# Altium PCB Hands_free_Motordrive_V1.PcbDoc
Units mil, origin at the board's own origin, x right, y up, seen from the top; angles counter-clockwise.
Board outline 1400 x 1900 mil, 2 copper layers (Top Layer, Bottom Layer); 32 components, 23 nets, 109 pads, 94 vias.
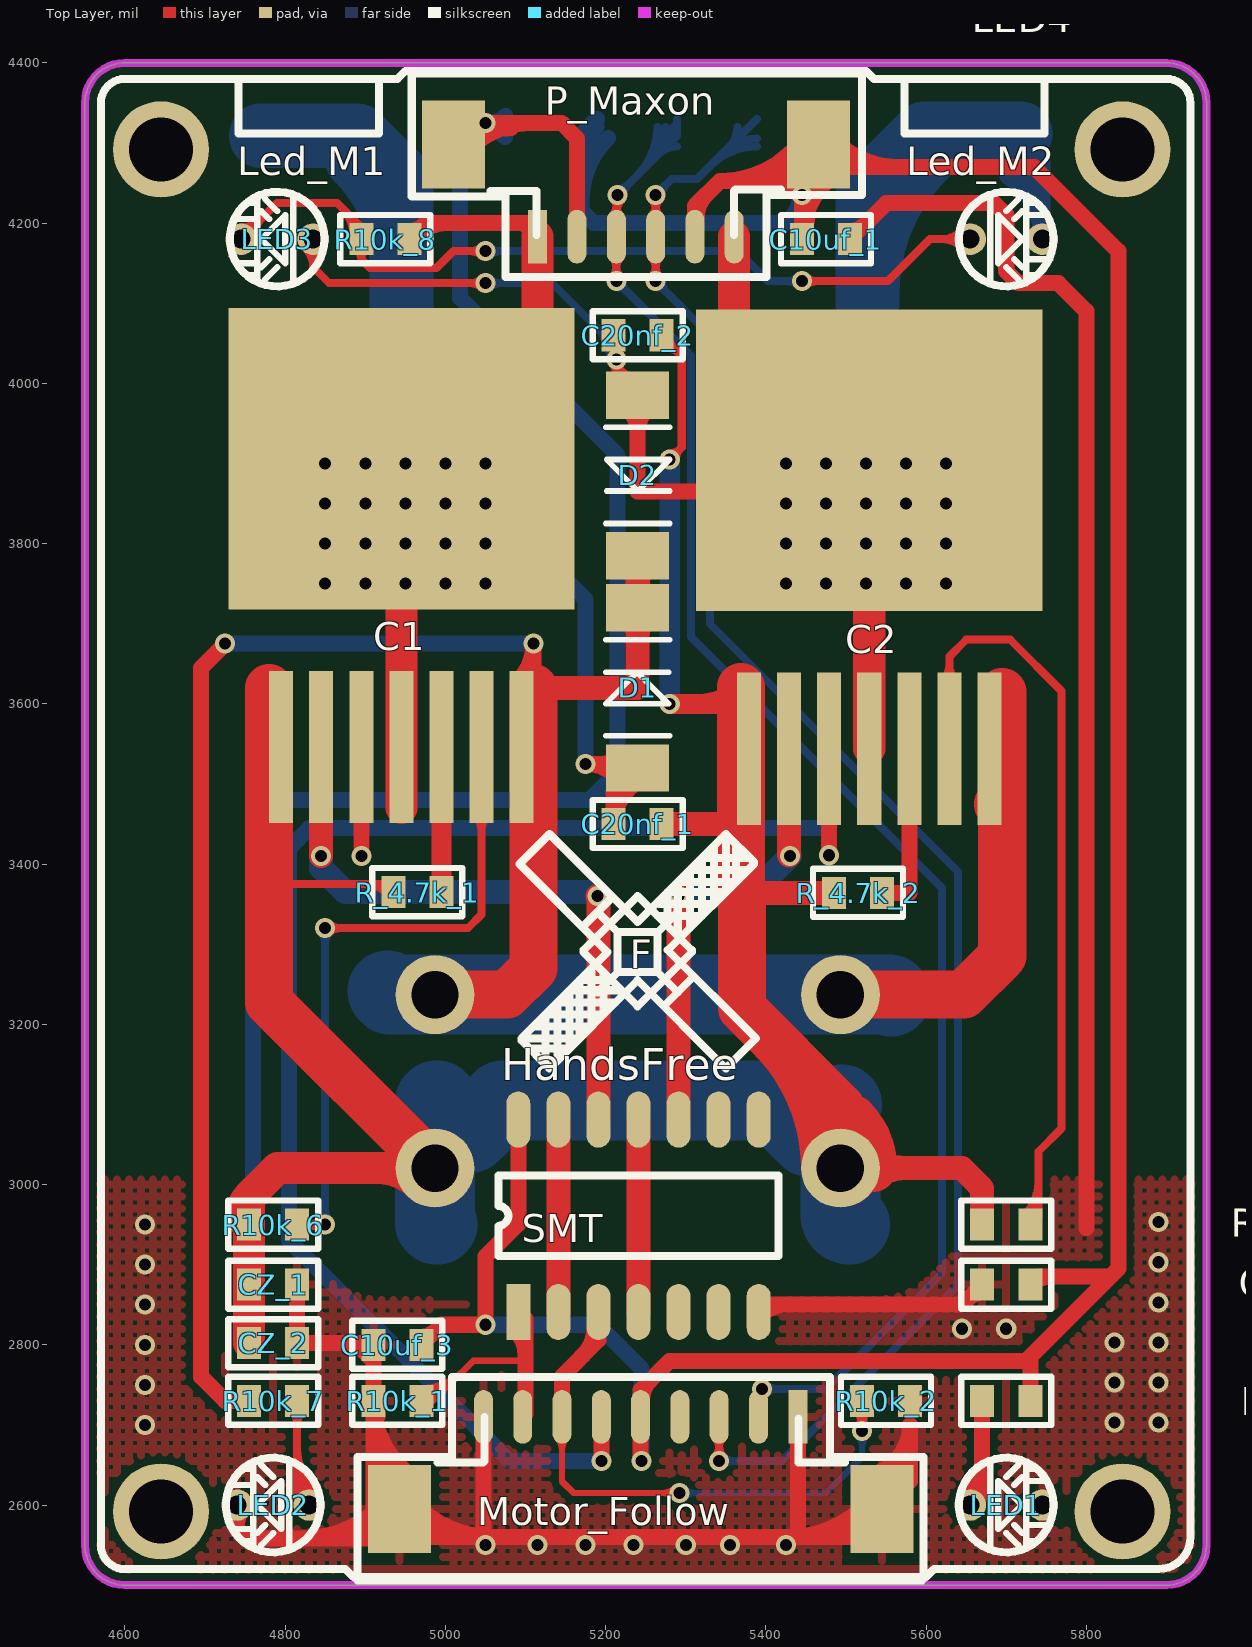
[diagram p0: Top Layer view]
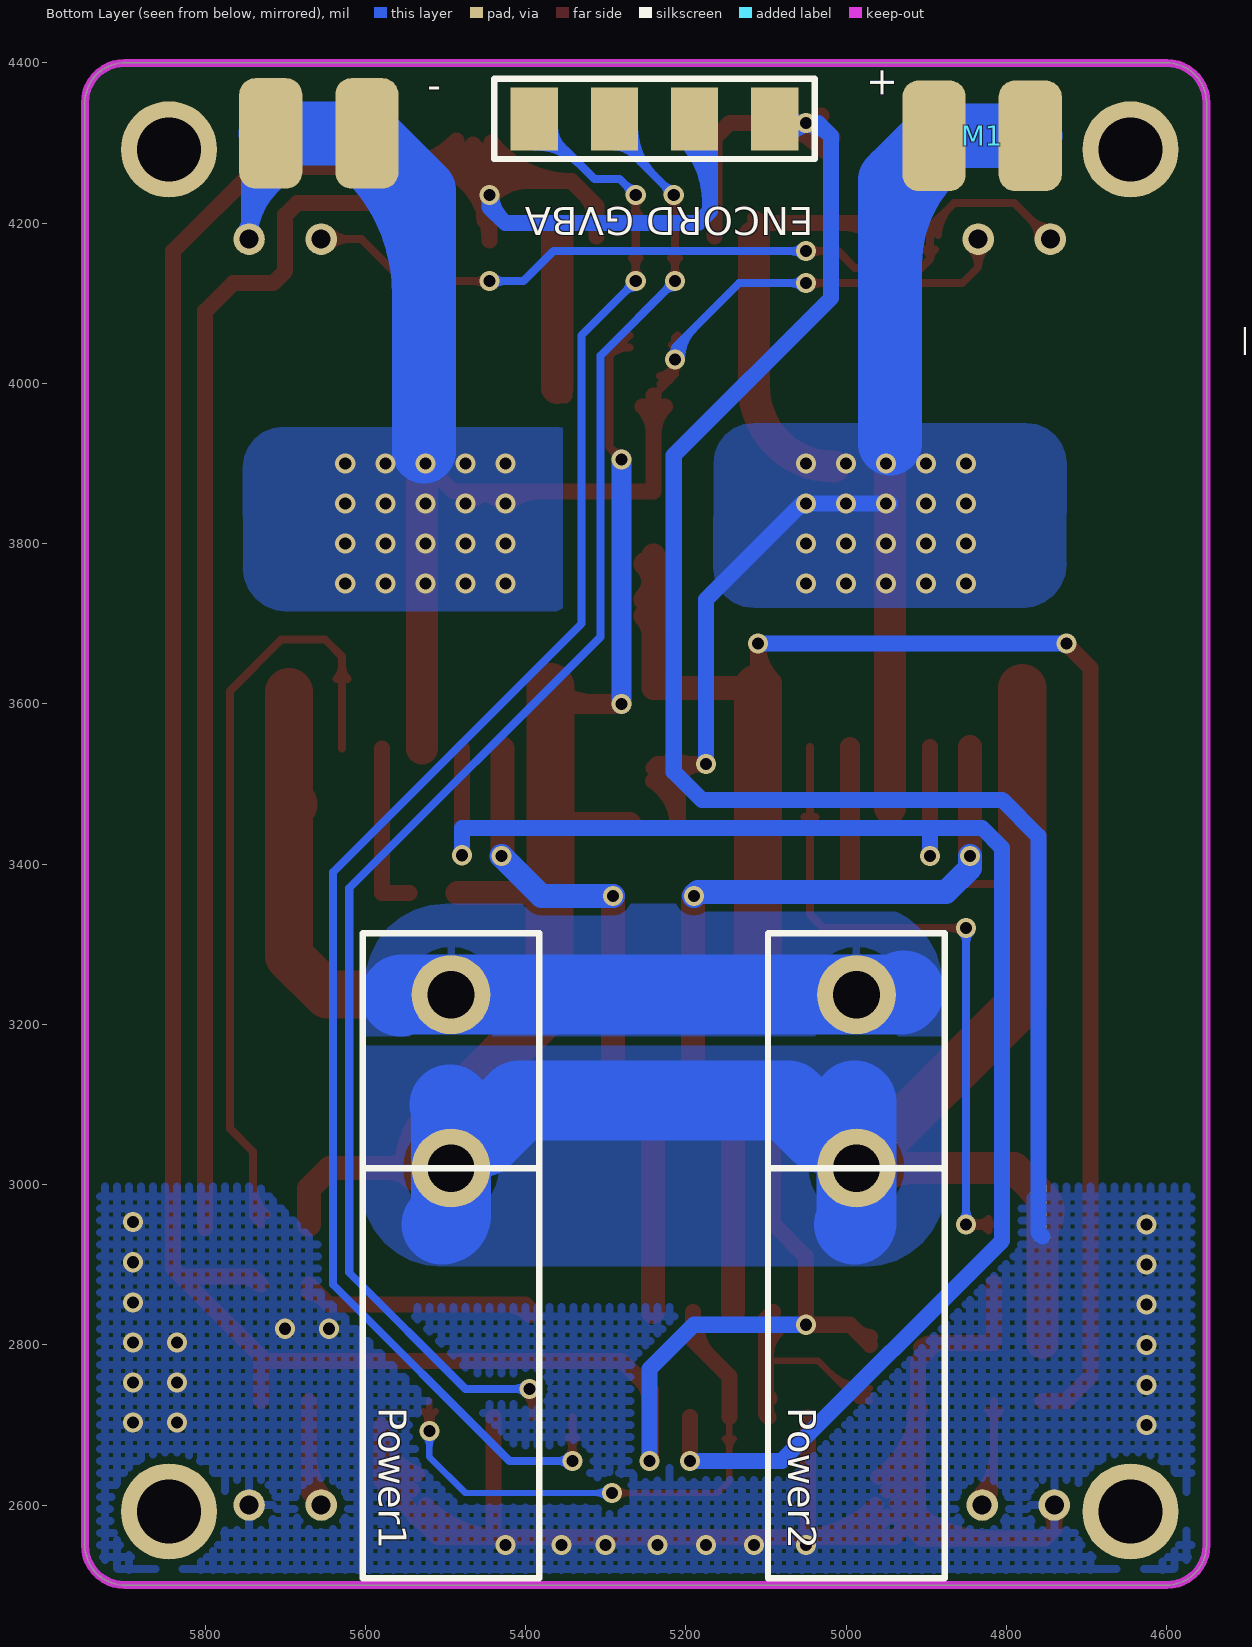
[diagram p1: Bottom Layer view, seen from below]

## Layer stack, top to bottom
Top Layer: signal copper 1.4
Dielectric: dielectric 12.6, FR-4, Dk 4.8
Bottom Layer: signal copper 1.4

## Board outline
4550,2550 4550,4350 cw(c4600,4350) 4600,4400 5900,4400 cw(c5900,4350) 5950,4350 5950,2550 cw(c5900,2550) 5900,2500 4600,2500 cw(c4600,2550)

## Design rules (kind name [scope] priority, off if disabled: settings)
Clearance [All] p1: gap=9
ComponentClearance [All] p1 off: gap=10 collisioncheckmode=3 verticalgap=10 showdistances=FALSE
Height [All] p1 off: minheight=0 maxheight=1000 prefheight=500
HoleToHoleClearance [All] p1: gap=6 allowstackedmicrovias=TRUE
MinimumSolderMaskSliver [All] p1: minsoldermaskwidth=0
PolygonConnect [All] p1: connectstyle=Relief reliefconductorwidth=10 reliefentries=4 polygonreliefangle="90 Angle"
RoutingVias [All] p1: holewidth=28 width=50 viastyle="Through Hole" minholewidth=10 minwidth=20 maxholewidth=50 maxwidth=50
SilkToSilkClearance [All] p1: silktosilkclearance=0
SilkscreenOverComponentPads SilkToSolderMaskClearance [IsPad] p1: minsilkscreentomaskgap=0
SolderMaskExpansion [All] p1: expansion=4
Width [All] p1: maxlimit=200 minlimit=7 preferedwidth=7
22 further rules are at their usual default settings.

## Components (designator, comment, footprint, x,y, rotation, side; value= is the part's Value field where it differs from the comment)
C1 "CHP_BTS7970" CHP_BTS7970_P-TO-263_7 4795,3546 r0 top
C2 "CHP_BTS7970" CHP_BTS7970_P-TO-263_7 5379,3544 r0 top
C10uf_1 "ELE_Cap" ELE_0603_P 5475,4180 r0 top
C10uf_2 "ELE_Cap" ELE_0603_P 5700,2874.96 r180 top
C10uf_3 "ELE_Cap" ELE_0603_P 4940,2800 r180 top
C20nf_1 "ELE_Cap" ELE_0603_P 5240,3450 r0 top
C20nf_2 "ELE_Cap" ELE_0603_P 5240,4060 r180 top
CZ_1 "ELE_RES_1" ELE_0603_P 4785,2875 r0 top
CZ_2 "ELE_RES_1" ELE_0603_P 4785,2802 r0 top
D1 "1N4148" ELE_D1206 5340,3520 r90 top
D2 "1N4148" ELE_D1206 5140,3985 r270 top
"ENCORD GVBA" "HDR_Header_1*4" HDR_Header_2.54_PH_1*4 5089,4330 r0 bottom
LED1 "ELE_LED_DV" ELE_LED_DV 5650,2600 r0 top
LED2 "ELE_LED_DV" ELE_LED_DV 4835,2600 r180 top
LED3 "ELE_LED_DV" ELE_LED_DV 4840,4180 r180 top
LED4 "ELE_LED_DV" ELE_LED_DV 5650,4180 r0 top
M1 "HDR_Header_1*2" HDR_H_PH_2P 4770,4309 r270 bottom
M2 "HDR_Header_1*2" HDR_H_PH_2P 5598,4312 r270 bottom
Motor_Follow "*MOTOR" HDR_MOLEX_PH_1.25_9P 5440,2710 r180 top
P_Maxon "HANDS_FREE_MAXON_MOLEX6P" HDR_MOLEX_PH_1.25_6P 5115,4183 r0 top
Power1 "HDR_Header_Power_2P" HDR_MOLEX_POWER5557_DH_2P 5493,3237 r270 bottom
Power2 "HDR_Header_Power_2P" HDR_MOLEX_POWER5557_DH_2P 4987,3237 r270 bottom
R1k_1 "ELE_RES_1" ELE_0603_P 5700,2729.96 r180 top
R10k_1 "ELE_RES_1" ELE_0603_P 4940,2730 r0 top
R10k_2 "ELE_RES_1" ELE_0603_P 5550,2729.96 r180 top
R10k_5 "ELE_RES_1" ELE_0603_P 5700,2950 r0 top
R10k_6 "ELE_RES_1" ELE_0603_P 4785,2950 r0 top
R10k_7 "ELE_RES_1" ELE_0603_P 4785,2730 r0 top
R10k_8 "ELE_RES_1" ELE_0603_P 4925,4180 r0 top
R_4.7k_1 "ELE_RES_1" ELE_0603_P 4965,3365 r0 top
R_4.7k_2 "ELE_RES_1" ELE_0603_P 5515,3364 r0 top
SMT "CHP_74HC14" CHP_SOP_14P 5091,2841 r90 top

## Footprints (in the part's own frame and the unit in brackets; to place one, negate y for a bottom-side part, rotate by r counter-clockwise, add the part's x,y. Pads: shape width x height; smd on the part's side, far side on the other; paste and mask are expansions set on the pad)
CHP_BTS7970_P-TO-263_7 [mil]
  rect 30x190 smd: 1(0,0) 2(50,0) 3(100,0) 4(150,0) 5(200,0) 6(250,0) 7(300,0)
  rect 432x376 smd: 8(150,360)
CHP_SOP_14P [mil]
  rect 70x30 smd: 1(0,0)
  oval 70x30 smd: 2(0,-50) 3(0,-100) 4(0,-150) 5(0,-200) 6(0,-250) 7(0,-300) 8(240,-300) 9(240,-250) 10(240,-200) 11(240,-150) 12(240,-100) 13(240,-50) 14(240,0)
  silkscreen extent 70,-325 170,25
ELE_0603_P [mil]
  rect 30x40 smd: 1(-30,0) 2(30,0)
  silkscreen extent -56,-30 56,30
ELE_D1206 [mm]
  rect 1.5x2 smd: 1(0,2.54) 2(5.08,2.54)
  silkscreen extent 1.02,1.52 4.06,3.56
ELE_LED_DV [mm] "Connector; Header; 2 Po"
  round 1 hole 0.6: 1(0.127,0) 2(2.413,0)
  silkscreen extent -0.23,-1.5 2.77,1.5
HDR_H_PH_2P [mm]
  rrect50% 3.5x2 smd: 1(0,0) 2(0,-3.048)
HDR_Header_2.54_PH_1*4 [mm] "Connector; Header; 4 Position"
  rect 1.5x2 smd: 1(0,0) 2(2.54,0) 3(5.08,0) 4(7.62,0)
  silkscreen extent -1.27,-1.27 8.89,1.27
HDR_MOLEX_PH_1.25_6P [mm]
  rect 0.6x1.7 smd: 1(0,0)
  oval 0.6x1.7 smd: 2(1.25,0) 3(2.5,0) 4(3.745,0) 5(4.989,0) 6(6.234,0)
  rect 2x2.8 smd: 7(-2.667,2.921) 8(8.901,2.921)
  silkscreen extent -3.99,-1.27 10.29,5.18
HDR_MOLEX_PH_1.25_9P [mm]
  rect 0.6x1.7 smd: 1(0,0)
  oval 0.6x1.7 smd: 2(1.25,0) 3(2.5,0) 4(3.745,0) 5(4.989,0) 6(6.234,0) 7(7.478,0) 8(8.723,0) 9(9.968,0)
  rect 2x2.8 smd: 10(-2.667,2.921) 11(12.635,2.921)
  silkscreen extent -3.99,-1.27 13.97,5.18
HDR_MOLEX_POWER5557_DH_2P [mm]
  round 2.5 hole 1.5: 1(0,0) 2(5.5,0)
  silkscreen extent -1.95,-2.8 18.5,2.8

## Part data
C10uf_1 C10uf_2 C10uf_3 C20nf_1 C20nf_2: "µçÈ"
CZ_1 CZ_2 R1k_1 R10k_1 R10k_2 R10k_5 R10k_6 R10k_7 R10k_8 R_4.7k_1 R_4.7k_2: "µç×"
D1 D2: library part ELE_Diode, "二极"
LED1 LED2 LED3 LED4: "发光二极管 直插"
Motor_Follow: library part HANDS_FREE_MOTOR
SMT: "反相施密特 7输入"

## Free pads (board coordinates)
  round 120 hole 80: 0(4645,2592) 0(4645,4292) 0(5845,2592) 0(5845,4292)

## Via types
v1: diameter 25, hole 15, Top Layer to Bottom Layer, 94 vias

## Nets (pads, with @x,y where several pads share a name; then routed paths per layer and width w, separated by ;. In a path a pad name is that pad's centre, name@x,y a point inside that pad or via, vN(x,y) a via of type N, cw(c..) or ccw(c..) an arc to the next point about the centre after c; other vN are vias at no path point)
A_Y1: SMT.4 SMT.11 | length 240
  Top Layer w30: SMT.4 SMT.11
ADC: Motor_Follow.4
B_Y1: SMT.2 SMT.13 | length 240
  Top Layer w30: SMT.2 SMT.13
ENCORD_A: "ENCORD GVBA.4" Motor_Follow.3 P_Maxon.4 | length 2510.1
  Top Layer w10: v1@5257.12,4132.88 ccw(c5244.32,4145.68) 5262.43,4145.68 ccw(c5280.53,4145.68) v1@5267.73,4132.88 ; v1@5257.12,4229.7 cw(c5244.32,4216.89) 5262.43,4216.89 cw(c5280.53,4216.89) v1@5267.73,4229.7 ; P_Maxon.4@5257.61,4156.53 cw(c5245.98,4144.9) 5262.43,4144.9 cw(c5278.87,4144.9) P_Maxon.4@5267.24,4156.53 ; P_Maxon.4@5257.61,4209.47 ccw(c5245.98,4221.1) 5262.43,4221.1 ccw(c5278.87,4221.1) P_Maxon.4@5267.24,4209.47 ; v1(5262.43,4127.57) P_Maxon.4 v1@5262.43,4232.43 ; v1@5336.27,2660.3 ccw(c5323.47,2673.11) 5341.57,2673.11 ccw(c5359.68,2673.11) v1@5346.88,2660.3 ; Motor_Follow.3@5336.76,2683.53 cw(c5325.13,2671.9) 5341.57,2671.9 cw(c5358.02,2671.9) Motor_Follow.3@5346.39,2683.53 ; v1@5341.57,2656.57 Motor_Follow.3
  Bottom Layer w10: v1@5262.43,4120.07 cw(c5262.43,4101.97) 5275.23,4114.77 cw(c5288.03,4127.57) v1@5269.93,4127.57 ; v1(5262.43,4127.57) 5330,4060 5330,3700 5640,3390 5640,2875 5420,2655 v1(5341.57,2655) ; v1(5262.43,4235) 5282.43,4255 5314,4255 5389,4330 ; v1@5262.43,4242.5 ccw(c5262.43,4260.61) 5275.23,4247.8 ccw(c5288.03,4235) v1@5269.93,4235 ; 5330.33,4271.33 cw(c5389,4212.65) 5389,4295.63 ; v1@5346.88,2649.7 cw(c5359.68,2636.89) 5359.68,2655 cw(c5359.68,2673.11) v1@5346.88,2660.3 ; 5347.4,4288.4 cw(c5389,4246.8) 5389,4305.63 ; 5354.09,4295.09 ccw(c5329.02,4320.16) 5364.47,4320.16
ENCORD_B: "ENCORD GVBA.3" Motor_Follow.2 P_Maxon.3 | length 2352.4
  Top Layer w10: v1@5208.12,4132.88 ccw(c5195.32,4145.68) 5213.43,4145.68 ccw(c5231.53,4145.68) v1@5218.73,4132.88 ; P_Maxon.3@5208.61,4156.53 cw(c5196.98,4144.9) 5213.43,4144.9 cw(c5229.87,4144.9) P_Maxon.3@5218.24,4156.53 ; P_Maxon.3@5208.61,4209.47 ccw(c5196.98,4221.1) 5213.43,4221.1 ccw(c5229.87,4221.1) P_Maxon.3@5218.24,4209.47 ; v1@5209.7,4229.7 cw(c5200.7,4220.7) 5213.43,4220.7 ; v1(5213.43,4127.57) P_Maxon.3 5213.43,4233.43 v1(5215,4235) ; P_Maxon.3@5213.43,4213.09 cw(c5236.91,4213.09) v1@5220.3,4229.7 ; Motor_Follow.2 5390.79,2740.79 v1(5395,2745) ; Motor_Follow.2@5390.79,2716.72 cw(c5423.28,2716.72) v1@5400.3,2739.7
  Bottom Layer w10: v1@5213.43,4120.07 cw(c5213.43,4101.97) 5226.23,4114.77 cw(c5239.03,4127.57) v1@5220.93,4127.57 ; v1(5213.43,4127.57) 5306.5,4034.5 5306.5,3683.5 5620,3370 5620,2890 5475,2745 v1(5395,2745) ; v1(5215,4235) 5289,4309 5289,4330 ; v1@5215,4242.5 ccw(c5215,4260.61) 5227.8,4247.8 ccw(c5240.61,4235) v1@5222.5,4235 ; 5239.24,4259.24 ccw(c5178.32,4320.16) 5264.47,4320.16 ; 5256.31,4276.31 ccw(c5212.46,4320.16) 5274.47,4320.16 ; 5266.18,4286.18 cw(c5289,4263.35) 5289,4295.63 ; 5273.38,4293.38 ccw(c5246.61,4320.16) 5284.47,4320.16 ; v1@5400.3,2739.7 cw(c5413.11,2726.89) 5413.11,2745 cw(c5413.11,2763.11) v1@5400.3,2750.3
GND: C1.1 C2.1 C20nf_1.2 C20nf_2.1 CZ_1.1 CZ_2.1 Power1.2 Power2.2 R10k_5.1 R10k_6.1 R_4.7k_1.1 R_4.7k_2.1 | length 4476.7
  Top Layer w10: 4780,3365 4800,3375 4925,3375 R_4.7k_1.1 ; 4898.79,3375 cw(c4898.79,3333.79) R_4.7k_1.1@4927.93,3362.93 ; C20nf_2.1 5295,4035 ; C20nf_2.1@5270.19,4045 cw(c5270.84,4010.84) 5295,4035 ; v1(5280,3905) 5295,3920 5295,4035 ; v1@5280,3912.5 ccw(c5280,3930.61) 5292.8,3917.8 ccw(c5305.61,3905) v1@5287.5,3905 ; C20nf_2.1@5280,4055 ccw(c5292.07,4055) C20nf_2.1@5283.53,4046.46
  Top Layer w25: v1(5280,3600) 5355,3600 ; 5315.02,3600 ccw(c5315.02,3687.98) C2.1@5377.23,3625.77
  Top Layer w30: C20nf_1.2 C2.1@5368,3450 ; 5345.2,3450 ccw(c5345.2,3497.8) C2.1@5379,3464 ; 5370,3364 R_4.7k_2.1 ; Power1.2 5644.54,3020.46 5670,2995 R10k_5.1 ; Power1.2@5517.19,2996.27 cw(c5575.6,2937.87) 5575.6,3020.46 cw(c5575.6,3103.06) Power1.2@5517.19,3044.66
  Top Layer w40: R10k_6.1@4750,2955 cw(c4810.36,2955) 4767.68,2997.68 ; R10k_6.1@4750.66,2952.52 cw(c4774.08,2965.92) 4755,2985 ; CZ_2.1 R10k_6.1 4755,2985 ; Power2.2@4966.34,2999.81 ccw(c4916.47,2949.94) 4916.47,3020.46 ccw(c4916.47,3090.99) Power2.2@4966.34,3041.12 ; Power2.2 4790.46,3020.46 4755,2985
  Top Layer w60: C1.1@4780,3620 4780,3227.46 Power2.2 ; 5369,3365 C2.1@5369,3621 ; 5370,3364 5370,3220 5493,3097 Power1.2 ; 5406.08,3183.92 cw(c5242.63,3020.46) Power1.2@5473.79,3020.46 ; 5508.51,3081.49 cw(c5447.48,3020.46) Power1.2@5533.79,3020.46
  Bottom Layer w25: v1(5280,3600) v1(5280,3905)
  Bottom Layer w100: 4990,2950 cw(c4990,2953) 4987,2953 Power2.2 4987,3102 cw(c4990,3102) 4990,3105 ; 5030.77,3064.23 5071.54,3105 5408.46,3105 5454.23,3059.23 ; 5495,3100 ccw(c5495,3098) 5493,3098 Power1.2 5493,2962 ccw(c5505,2962) 5505,2950
GND_L: "ENCORD GVBA.1" C10uf_1.2 C10uf_2.2 C10uf_3.2 CZ_1.2 CZ_2.2 LED1.2 LED2.2 Motor_Follow.1 Motor_Follow.9 Motor_Follow.10 Motor_Follow.11 P_Maxon.2 P_Maxon.7 R10k_1.1 R10k_2.1 SMT.7 | length 7230.4
  Top Layer w20: LED2.2@4733.15,2593.15 cw(c4716.62,2576.62) 4740,2576.62 cw(c4763.38,2576.62) LED2.2@4746.85,2593.15 ; LED2.2 4740,2570 4751.5,2558.5 4906.07,2558.5 Motor_Follow.11@4923.29,2575.71 ; CZ_1.2@4815,2877 CZ_1.2 CZ_2.2 4888,2802 4910,2780 R10k_1.1 ; 4821.57,2558.5 ccw(c4821.57,2700.26) Motor_Follow.11@4921.81,2600.02 ; 4869.85,2558.5 ccw(c4869.85,2651.97) Motor_Follow.11@4935.95,2585.88 ; R10k_1.1@4907.5,2720.67 cw(c4899.26,2706.39) R10k_1.1@4915.18,2710.66 ; 4910,2652.99 ccw(c4972.26,2652.99) Motor_Follow.11@4936.46,2602.05 ; 4910,2691.49 ccw(c4999.32,2691.49) Motor_Follow.11@4947.96,2618.41 ; Motor_Follow.11@4949.2,2585.88 ccw(c5011.67,2648.35) 5011.67,2560 ; Motor_Follow.11@4959.46,2634.78 cw(c5026.38,2730) R10k_1.1 ; Motor_Follow.11@4963.34,2600.02 ccw(c5059.96,2696.64) 5059.96,2560 ; P_Maxon.7@5016.63,4307.12 cw(c5059.79,4263.96) v1@5059.79,4325 ; P_Maxon.7@5026.64,4290.03 ccw(c4997.11,4331.32) P_Maxon.7@5047.52,4325.3 ; P_Maxon.7@5030.77,4292.98 cw(c5108.07,4215.68) 5108.07,4325 ; P_Maxon.7@5030.77,4334.52 ccw(c5053.74,4357.49) v1@5053.74,4325 ; P_Maxon.7@5032.08,4333.12 ccw(c5050,4348.84) v1(5050,4325) 5145,4325 5164.21,4305.79 P_Maxon.2 ; v1@5047.57,2560.43 Motor_Follow.9 ; v1@5051.68,4326.85 ccw(c5074.38,4351.8) 5082.01,4318.95 ; SMT.7 5400,2850 5645.04,2850 C10uf_2.2 ; SMT.7@5394.54,2837.46 cw(c5424.8,2807.2) 5424.8,2850 ; v1@5427.62,2560 ccw(c5427.62,2696.64) Motor_Follow.10@5524.23,2600.02 ; 5440,2562 Motor_Follow.1 ; 5475.9,2560 ccw(c5475.9,2648.35) Motor_Follow.10@5538.37,2585.88 ; C10uf_1.2 5550,4225 5685,4225 5700,4210 5700,4140 5715,4125 5765,4125 5800,4090 5800,2946 ; C10uf_1.2@5505,4190 ccw(c5505,4214.14) 5522.07,4197.07 ; Motor_Follow.10@5535.73,2638.62 ccw(c5515.31,2700) 5580,2700 5580,2630 Motor_Follow.10 5510,2560 4939,2560 Motor_Follow.11@4923.29,2575.71 ; Motor_Follow.10@5542.04,2619.64 ccw(c5524.54,2672.27) 5580,2672.27 ; Motor_Follow.10@5548.36,2600.66 ccw(c5533.76,2644.54) Motor_Follow.10@5580,2644.54 ; 5652.93,2857.89 cw(c5670,2840.82) C10uf_2.2@5670,2864.96 ; R10k_1.1 4910,2589 Motor_Follow.11@4923.29,2575.71 ; 4893.1,2802 cw(c4893.1,2783.1) 4906.46,2796.46 ccw(c4893.1,2783.1) 4893.1,2802
  Bottom Layer w20: 4755,2935 4760,2940 4760,3435 4805,3480 5180,3480 5215,3515 5215,3910 5018.5,4106.5 5018.5,4308.5 5035,4325 ; 5020.13,4310.13 cw(c5050,4280.25) v1@5050,4322.5 ; 5071.45,4311.6 ccw(c5050,4301.14) v1(5050,4325) 5035,4325 ; 5074.36,4307.24 ccw(c5035,4272.52) 5035,4325 ; v1@5053.55,4325 ccw(c5053.55,4355.61) 5075.19,4333.97 cw(c5053.55,4355.61) v1@5053.55,4325
  other v1: 5050,2550 5115,2550 5175,2550 5235,2550 5300,2550 5355,2550 5425,2550 4625,2700 5835,2703 5890,2703 4625,2750 5835,2753 5890,2753 4625,2800 5835,2803 5890,2803 5645,2820 5700,2820 4625,2850 5890,2853 4625,2900 5890,2903 4625,2950 5890,2953
IO_EN: C1.3 C2.3 Motor_Follow.6 | length 2070.8
  Top Layer w20: v1(4895,3410) C1.3 ; v1@5194.57,2655.43 Motor_Follow.6 ; v1(5479,3411) C2.3
  Bottom Layer w20: v1(4895,3410) 4895,3445 ; v1(5195,2655) 5080,2655 4805,2930 4805,3420 4830,3445 4895,3445 ; v1(5479,3411) 5479,3445 4895,3445
IS_1: C1.6 R10k_6.2 | length 1033.7
  Top Layer w10: R10k_6.2 v1(4850,2950) ; R10k_6.2@4822.07,2942.93 cw(c4839.14,2925.86) 4839.14,2950 cw(c4839.14,2974.14) R10k_6.2@4822.07,2957.07 ; 4831.77,2948.03 cw(c4835.29,2934.92) v1@4844.76,2944.63 ; 4831.77,2951.98 ccw(c4835.29,2965.09) v1@4844.76,2955.37 ; v1@4844.7,2944.7 ccw(c4831.89,2931.89) 4831.89,2950 ccw(c4831.89,2968.11) v1@4844.7,2955.3 ; v1(4850,3320) 5028,3320 5045,3337 C1.6 ; v1@4855.3,3314.7 cw(c4868.11,3301.89) 4868.11,3320 cw(c4868.11,3338.11) v1@4855.3,3325.3 ; C1.6@5037.93,3458.93 cw(c5020.86,3441.86) 5045,3441.86 cw(c5069.14,3441.86) C1.6@5052.07,3458.93
  Bottom Layer w10: v1@4844.7,2955.3 ccw(c4831.89,2968.11) 4850,2968.11 ccw(c4868.11,2968.11) v1@4855.3,2955.3 ; v1@4844.7,3314.7 cw(c4831.89,3301.89) 4850,3301.89 cw(c4868.11,3301.89) v1@4855.3,3314.7 ; v1(4850,2950) v1(4850,3320)
IS_2: C2.6 R10k_5.2 | length 1082.9
  Top Layer w10: C2.6@5621.93,3631.07 ccw(c5604.86,3648.14) 5629,3648.14 ccw(c5653.14,3648.14) C2.6@5636.07,3631.07 ; C2.6 5629,3659 5650,3680 5705,3680 5769,3616 5769,3070 5740,3041 5740,2960 R10k_5.2 ; R10k_5.2@5722.93,2962.07 ccw(c5681.72,3003.28) 5740,3003.28 ; R10k_5.2@5730,2955 ccw(c5705.86,2979.14) 5740,2979.14
L_IN1: C1.2 SMT.12 | length 789.9
  Top Layer w30: v1(4845,3410) C1.2 ; v1(5190,3360) 5191,3359 SMT.12
  Bottom Layer w30: v1(4845,3410) 4845,3395 4875,3365 5185,3365 v1(5190,3360)
L_IN2: C2.2 SMT.10 | length 571.7
  Top Layer w30: SMT.10 v1(5291,3360) ; v1@5429,3411 C2.2
  Bottom Layer w30: v1(5291,3360) 5380,3360 v1(5430,3410)
MP1: C1.4 C1.8 C20nf_1.1 D1.1 M1.1 M1.2 P_Maxon.1 R10k_8.2 | length 2659.7
  Top Layer w20: R10k_8.2 4975,4200 5098,4200 P_Maxon.1 ; R10k_8.2@4955,4190 ccw(c4955,4214.14) 4972.07,4197.07 ; R10k_8.2@4958.54,4181.46 cw(c5003.28,4136.72) 5003.28,4200 ; 5195.09,3525 ccw(c5195.09,3555.07) D1.1@5216.35,3533.81 ; C20nf_1.1@5210,3447.16 cw(c5277.16,3447.16) D1.1@5240.75,3503.59 ; C20nf_1.1 5210,3490 ; 5210,3483.87 cw(c5253.47,3483.87) D1.1@5229.9,3520.4 ; D1.1@5215.66,3506.92 ccw(c5175,3470.25) v1(5175,3525) 5235,3525 D1.1 ; 5099.39,4200 ccw(c5099.39,4220.26) 5113.72,4205.93 cw(c5099.39,4220.26) 5099.39,4200
  Top Layer w40: C1.4@4945,3470 C1.4 C1.8 ; C1.8@5015,3896 ccw(c5015,3996) 5115,3996 P_Maxon.1
  Bottom Layer w20: v1@4945,3850 5055,3850 5175,3730 v1(5175,3525) ; v1@5050,3847.5 cw(c5050,3829.39) 5062.8,3842.2
  Bottom Layer w80: M1.1 M1.2 4945,4254 4945,3925 ; M1.2@4890,4280.1 cw(c4890,4210.34) 4939.33,4259.67 ; M1.2@4890.07,4280.1 cw(c4883.4,4218.86) 4945,4218.86 ; M1.2@4890.45,4279.92 cw(c4758.74,4148.21) 4945,4148.21
  other v1: 4850,3750 4900,3750 4950,3750 5000,3750 5050,3750 4850,3800 4900,3800 4950,3800 5000,3800 5050,3800 4850,3850 4900,3850 4950,3850 5000,3850 5050,3850 4850,3900 4900,3900 4950,3900 5000,3900 5050,3900
MP2: C2.4 C2.8 C20nf_2.2 D2.1 LED3.1 LED4.2 M2.1 M2.2 P_Maxon.6 | length 3414.9
  Top Layer w10: LED3.1@4824.71,4169.52 cw(c4800.64,4145) 4835,4145 ; LED3.1 4835,4145 ; LED3.1@4845.29,4169.52 ccw(c4869.36,4145) 4835,4145 ; v1@5044.7,4119.7 ccw(c5031.89,4106.89) 5031.89,4125 ccw(c5031.89,4143.11) v1@5044.7,4130.3 ; v1(5050,4125) 4855,4125 4835,4145 ; C20nf_2.2@5204.41,4046.71 cw(c5193,4029.77) v1@5213.43,4029.77 ; v1@5208.12,4024.7 cw(c5195.32,4011.89) 5213.43,4011.89 cw(c5231.53,4011.89) v1@5218.73,4024.7 ; v1@5208.12,4035.3 ccw(c5195.32,4048.11) 5213.43,4048.11 ccw(c5231.53,4048.11) v1@5218.73,4035.3 ; C20nf_2.2 5213.43,4056.57 v1(5213.43,4030) ; v1@5213.43,4019.09 ccw(c5233.12,4019.09) D2.1@5231.41,3999.47 ; v1@5213.43,4039.13 cw(c5225.87,4039.13) C20nf_2.2@5217.07,4047.93 ; D2.1@5214.8,4013.97 cw(c5224.28,4016.51) v1@5218.13,4024.16 ; D2.1@5232.28,4009.44 cw(c5234.07,4030) v1(5213.43,4030) ; D2.1 5213.43,4011.57 v1(5213.43,4030)
  Top Layer w20: D2.1@5226.19,3971.19 cw(c5192.86,3937.86) 5240,3937.86 cw(c5287.14,3937.86) D2.1@5253.81,3971.19 ; D2.1 5240,3865 5490,3865 C2.8 ; C2.8@5351.43,3985 C2.8@5360.43,3994 ; C2.8@5382.75,3865 cw(c5382.75,3807.75) C2.8@5423.23,3848.23 ; C2.8@5426.77,3848.23 cw(c5467.25,3807.75) C2.8@5467.25,3865 ; C2.8@5432.75,3865 cw(c5432.75,3807.75) C2.8@5473.23,3848.23
  Top Layer w40: C2.8@5360.43,3994 P_Maxon.6 ; C2.4 C2.8
  Bottom Layer w10: v1(5050,4125) 5133.43,4125 5213.43,4045 ; v1@5055.3,4119.7 cw(c5068.11,4106.89) 5068.11,4125 cw(c5068.11,4143.11) v1@5055.3,4130.3 ; 5190.02,4068.41 cw(c5151.61,4030) v1@5205.93,4030 ; 5207.09,4051.34 cw(c5185.75,4030) v1@5215.93,4030 ; v1@5208.93,4036 ccw(c5202.18,4045) 5213.43,4045 ; v1(5213.43,4030) 5213.43,4045 ; v1@5217.93,4036 cw(c5224.67,4045) 5213.43,4045
  Bottom Layer w20: M2.2@5701.59,4258.12 cw(c5646.59,4176.51) LED4.2@5745,4176.51 ; M2.2@5712.76,4274.7 cw(c5671.92,4214.1) 5745,4214.1 ; M2.2 5745,4285 LED4.2 ; M2.2@5723.94,4291.29 cw(c5697.26,4251.7) M2.2@5745,4251.7 ; LED4.2@5738.15,4186.85 ccw(c5721.62,4203.38) 5745,4203.38 ccw(c5768.38,4203.38) LED4.2@5751.85,4186.85
  Bottom Layer w80: 5526.62,3915 5526.62,4240.62 M2.1 M2.2 ; 5526.62,4111.66 cw(c5768.81,4111.66) M2.1@5597.55,4282.92 ; 5526.62,4199.73 cw(c5611.01,4199.73) M2.1@5597.9,4283.09 ; 5548.67,4262.67 cw(c5598,4213.34) M2.1@5598,4283.1
  other v1: 5425,3750 5475,3750 5525,3750 5575,3750 5625,3750 5425,3800 5475,3800 5525,3800 5575,3800 5625,3800 5425,3850 5475,3850 5525,3850 5575,3850 5625,3850 5425,3900 5475,3900 5525,3900 5575,3900 5625,3900
NetC1_5: C1.5 R_4.7k_1.2 | length 181
  Top Layer w25: R_4.7k_1.2 C1.5
NetC2_5: C2.5 R_4.7k_2.2 | length 214
  Top Layer w20: R_4.7k_2.2 5579,3364 C2.5
NetLED1_1: LED1.1 R1k_1.2 | length 226.3
  Top Layer w20: LED1.1@5648.15,2606.85 ccw(c5595.41,2659.59) 5670,2659.59 ; LED1.1 5670,2615 ; LED1.1@5655.69,2609.66 ccw(c5657,2628) 5670,2615 ; LED1.1@5664.66,2600.69 cw(c5683,2602) 5670,2615 ; R1k_1.2 5670,2615
NetLED2_1: LED2.1 R10k_7.2 | length 340.8
  Top Layer w10: R10k_7.2@4807.93,2717.93 cw(c4790.86,2700.86) 4815,2700.86 cw(c4839.14,2700.86) R10k_7.2@4822.07,2717.93 ; 4815,2623.38 ccw(c4853.38,2623.38) LED2.1@4826.24,2596.24 ; 4815,2647.52 ccw(c4877.52,2647.52) LED2.1@4833.31,2603.31 ; 4815,2671.66 ccw(c4901.66,2671.66) LED2.1@4840.38,2610.38 ; R10k_7.2 4815,2615 ; LED2.1@4816.63,2606.06 ccw(c4809.36,2609.36) 4815,2615 ; LED2.1@4823.94,2613.37 cw(c4820.64,2620.64) 4815,2615 ; LED2.1 4815,2615
NetLED3_2: LED3.2 LED4.1 R10k_8.1 | length 1341.4
  Top Layer w10: LED3.2 4790,4225 4865,4225 4895,4195 R10k_8.1 4895,4155 ; LED3.2@4745,4194.69 ccw(c4745,4230.14) 4770.07,4205.07 ccw(c4795.14,4180) LED3.2@4759.69,4180 ; 4870.86,4219.14 cw(c4836.72,4185) R10k_8.1@4885,4185 ; 4887.93,4202.07 cw(c4870.86,4185) R10k_8.1@4895,4185 ; R10k_8.1@4889,4167 cw(c4880,4155) 4895,4155 ; R10k_8.1@4901,4167 ccw(c4910,4155) 4895,4155 ; v1@5044.7,4159.7 ccw(c5031.89,4146.89) 5031.89,4165 ccw(c5031.89,4183.11) v1@5044.7,4170.3 ; v1(5050,4165) 5010,4165 4989,4144 4906,4144 4895,4155 ; v1(5445,4127.57) 5552.57,4127.57 5605,4180 LED4.1 ; v1@5450.3,4122.27 cw(c5463.11,4109.47) 5463.11,4127.57 cw(c5463.11,4145.68) v1@5450.3,4132.88 ; LED4.1@5644.62,4169.62 ccw(c5619.55,4144.55) 5619.55,4180 ccw(c5619.55,4215.45) LED4.1@5644.62,4190.38
  Bottom Layer w10: v1(5050,4165) 5365,4165 5402.43,4127.57 v1(5445,4127.57) ; v1@5055.3,4159.7 cw(c5068.11,4146.89) 5068.11,4165 cw(c5068.11,4183.11) v1@5055.3,4170.3 ; v1@5439.7,4122.27 ccw(c5426.89,4109.47) 5426.89,4127.57 ccw(c5426.89,4145.68) v1@5439.7,4132.88
PWM_A: Motor_Follow.8 R10k_1.2 SMT.1 | length 463.9
  Top Layer w8: R10k_1.2@4970,2738 ccw(c4970,2793.53) 5009.26,2754.26 ; R10k_1.2@4970,2746 ccw(c4970,2820.84) 5022.92,2767.92 ; 4995.61,2740.61 cw(c4970,2766.21) R10k_1.2 4985,2730 5035,2780 5100,2780
  Top Layer w20: SMT.1@5087.46,2817.46 cw(c5057.2,2787.2) 5100,2787.2 ; SMT.1 5100,2832 5100,2780 5100,2713.43 Motor_Follow.8 ; Motor_Follow.8@5095.29,2732.93 ccw(c5083.93,2744.29) 5100,2744.29
PWM_B: Motor_Follow.7 R10k_2.2 SMT.3 | length 981.8
  Top Layer w8: Motor_Follow.7@5140.05,2682.82 cw(c5126.72,2669.49) 5145.57,2669.49 cw(c5164.43,2669.49) Motor_Follow.7@5151.1,2682.82 ; Motor_Follow.7 5145.57,2629.43 5160,2615 v1(5292,2615) ; v1@5285.99,2608.99 ccw(c5271.48,2594.48) 5271.48,2615 ccw(c5271.48,2635.52) v1@5285.99,2621.01 ; R10k_2.2@5512.22,2717.18 cw(c5493.44,2698.4) 5520,2698.4 cw(c5546.56,2698.4) R10k_2.2@5527.78,2717.18 ; v1@5513.99,2698.51 ccw(c5499.48,2713.02) 5520,2713.02 ccw(c5540.52,2713.02) v1@5526.01,2698.51 ; v1@5514.17,2698.68 ccw(c5506.89,2706.38) 5517.13,2709.13 ccw(c5531.84,2713.07) v1@5524.24,2699.87 ; v1@5515.76,2699.87 ccw(c5508.16,2713.06) 5522.87,2709.12 ccw(c5533.1,2706.38) v1@5525.83,2698.68 ; v1(5520,2692.5) R10k_2.2
  Top Layer w20: Motor_Follow.7 5145.57,2760.57 5191,2806 SMT.3 ; 5171.86,2786.86 ccw(c5137.72,2821) SMT.3@5186,2821
  Bottom Layer w8: v1(5292,2615) 5475,2615 5520,2660 v1@5520,2690 ; v1@5298.01,2608.99 cw(c5312.52,2594.48) 5312.52,2615 cw(c5312.52,2635.52) v1@5298.01,2621.01 ; v1@5513.99,2686.49 cw(c5499.48,2671.98) 5520,2671.98 cw(c5540.52,2671.98) v1@5526.01,2686.49
VC5: "ENCORD GVBA.2" C10uf_1.1 C10uf_2.1 C10uf_3.1 Motor_Follow.5 P_Maxon.5 P_Maxon.8 R1k_1.1 SMT.14 | length 5025
  Top Layer w20: C10uf_3.1 4995,2825 v1(5050,2825) 5050,2910 5091,2951 SMT.14 ; C10uf_3.1@4970,2810 ccw(c4970,2834.14) 4987.07,2817.07 ; v1(5245,2655) 5243.57,2656.43 Motor_Follow.5 5243.57,2743.57 5280,2780 5725,2780 5840,2895 ; Motor_Follow.5@5245.39,2731.65 cw(c5278.54,2731.65) 5255.1,2755.1 ; P_Maxon.5 5311.43,4221.43 5342.5,4252.5 ; P_Maxon.5@5313.24,4204.65 cw(c5358.1,4204.65) 5326.38,4236.38 ; 5384.09,4252.5 ccw(c5384.09,4347.25) P_Maxon.8@5458.11,4288.1 ; 5396.72,4252.5 cw(c5396.72,4186.72) v1@5443.23,4233.23 ; 5425.67,4252.5 ccw(c5425.67,4314.02) P_Maxon.8@5473.73,4275.62 ; P_Maxon.8@5437.5,4252.5 5342.5,4252.5 ; P_Maxon.8@5442.48,4300.59 cw(c5342.5,4380.47) 5342.5,4252.5 ; v1@5443.17,4233.3 cw(c5419.22,4211.01) 5451.05,4203.45 ; v1@5444.73,4237.49 ccw(c5438.66,4294.22) P_Maxon.8@5483.07,4258.4 ; C10uf_1.1@5445,4177.98 cw(c5549.69,4177.98) P_Maxon.8@5483.89,4259.41 ; C10uf_1.1 5445,4277.57 P_Maxon.8 5493.43,4270 5735,4270 5840,4165 5840,2895 ; 5445,4219.86 cw(c5515.85,4219.86) P_Maxon.8@5471.31,4274.96 ; P_Maxon.8@5472.05,4288.88 ccw(c5517.63,4334.45) 5517.63,4270 ; P_Maxon.8@5486.19,4261.48 cw(c5506.75,4240.93) 5506.75,4270 ; P_Maxon.8@5486.19,4303.02 ccw(c5565.91,4382.74) 5565.91,4270 ; R1k_1.1 5730,2785 ; C10uf_2.1 5740.04,2885 5830,2885 5840,2895 ; C10uf_2.1@5733.53,2876.42 cw(c5754.24,2855.72) 5754.24,2885
  Bottom Layer w20: v1(5050,2825) 5190,2825 5245,2770 v1(5245,2655) ; 5170,4227.14 cw(c5282.01,4227.14) 5202.81,4306.35 ; 5170,4275.43 cw(c5233.73,4275.43) 5188.67,4320.49 ; 5189,4330 5170,4311 5170,4215 5185,4200 5425,4200 5445,4220 v1(5445,4235) ; 5430.13,4205.13 ccw(c5400.25,4235) v1@5442.5,4235
VC_B: C1.7 C2.7 D1.2 D2.2 Power1.1 Power2.1 R10k_7.1 | length 3640.9
  Top Layer w20: v1(4725,3675) 4695,3645 4695,2760 4725,2730 R10k_7.1 ; C1.7@5091.46,3629.54 ccw(c5046.72,3674.28) v1@5110,3674.28 ; 5110,3630 v1(5110,3675)
  Top Layer w30: C1.7@5095,3626 ccw(c5109.49,3640.49) C1.7@5109.49,3620 ; 5110,3620 5240,3620 D1.2 D2.2 ; D1.2@5229.73,3709.73 cw(c5204.93,3684.93) 5240,3684.93 cw(c5275.07,3684.93) D1.2@5250.27,3709.73 ; D1.2@5229.73,3730.27 ccw(c5204.93,3755.07) 5240,3755.07 ccw(c5275.07,3755.07) D1.2@5250.27,3730.27 ; D2.2@5229.73,3774.73 cw(c5204.93,3749.93) 5240,3749.93 cw(c5275.07,3749.93) D2.2@5250.27,3774.73
  Top Layer w60: Power2.1 5077,3237 5110,3270 5110,3620 ; Power1.1 5647,3237 5695,3285 5695,3615 ; C2.7@5689.61,3474.61 cw(c5676.59,3461.59) 5695,3461.59
  Bottom Layer w20: v1(4725,3675) v1(5110,3675)
  Bottom Layer w100: 4927.99,3242 ccw(c4932.99,3242) 4932.99,3237 Power2.1 Power1.1 5554,3237 cw(c5554,3235) 5556,3235
pads on no net: SMT.5 SMT.6 SMT.8 SMT.9

## Polygon pours and split planes (outlines as drawn)
VC_B on Bottom Layer "Top Layer-No Net" (solid, remove dead copper, pour order 19): 4880,3185 4880,3250 cw(c4980,3250) 4980,3350 4990,3350 5500,3350 cw(c5500,3250) 5600,3250 5600,3185
GND on Bottom Layer "Top Layer-No Net" (solid, remove dead copper, pour order 8): 4876.02,3173.4 4876.02,2998 ccw(c4976.02,2998) 4976.02,2898 5425.98,2898 5504.53,2898 ccw(c5504.53,2998) 5604.53,2998 5604.53,3173.4
MP1 on Bottom Layer "Top Layer-No Net" (solid, remove dead copper, pour order 10): 4725,3900 cw(c4775,3900) 4775,3950 5115,3950 cw(c5115,3900) 5165,3900 5165,3770 cw(c5115,3770) 5115,3720 4780,3720 cw(c4780,3775) 4725,3775
MP2 on Bottom Layer "Top Layer-No Net" (solid, remove dead copper, pour order 9): 5752.5,3895.24 ccw(c5702.5,3895.24) 5702.5,3945.24 5362.5,3945.24 ccw(c5362.5,3895.24) 5312.5,3895.24 5312.5,3765.24 ccw(c5362.5,3765.24) 5362.5,3715.24 5697.5,3715.24 ccw(c5697.5,3770.24) 5752.5,3770.24
GND_L on Bottom Layer "Top Layer-No Net" (hatched 90Degree grid 15 track 10, remove dead copper, pour order 12): 4432,2997.31 4757,2997.31 4877.71,2876.6 ccw(c4948.42,2947.31) 4948.42,2847.31 5007,2847.31 5540.58,2847.31 ccw(c5540.58,2947.31) 5611.29,2876.6 5732,2997.31 6021.64,2997.31 cw(c6021.64,2911.96) 6082,2972.31 6082,2538.74 cw(c5982,2538.74) 6052.71,2468.03 6007,2422.31 4648.42,2422.31 cw(c4648.42,2522.31) 4577.71,2451.6 4432,2597.31
GND_L on Top Layer "Top Layer-No Net" (hatched 90Degree grid 15 track 10, remove dead copper, pour order 11): 4453.46,3006 4728.46,3006 4849.17,2885.29 ccw(c4919.88,2956) 4919.88,2856 5128.46,2856 5537.03,2856 ccw(c5537.03,2956) 5607.75,2885.29 5728.46,3006 6003.46,3006 6003.46,2491.36 cw(c5918.1,2491.36) 5978.46,2431 4594.88,2431 cw(c4594.88,2531) 4524.17,2460.29 4453.46,2531

## Keep-outs
Keep-Out Layer:
  lines w10: 4550,2550 ccw(c4600,2550) 4600,2500 5900,2500 ccw(c5900,2550) 5950,2550 5950,4350 ccw(c5900,4350) 5900,4400 4600,4400 ccw(c4600,4350) 4550,4350 4550,2900 4550,2550

## Silkscreen, mask and mechanical layers (free items; w line width, h text height)
Top Overlay:
  lines w10: 4570,2779 4570,4350 cw(c4600,4350) 4600,4380 4940,4380 4950,4390 5525,4390 5535,4380 5900,4380 cw(c5900,4350) 5930,4350 5930,3160 ; 4570,2790 4570,2570 4570,2550 ccw(c4600,2550) 4600,2520 4620,2520 4875,2520 4885,2510 5600,2510 5610,2520 5880,2520 5890,2520 ccw(c5890,2560) 5930,2560 5930,2570 5930,3174 ; 4742,4378 4742,4312 4917,4312 4917,4380 ; 5107.5,3170 5155,3170 5155,3242.5 5217.5,3242.5 ; 5110,3197.5 5182.5,3197.5 5182.5,3265 ; 5125,3152.5 5125,3212.5 5197.5,3212.5 5197.5,3265 ; 5130,3147.5 5132.5,3147.5 ; 5140,3155 5140,3227.5 5212.5,3227.5 ; 5172.5,3322.5 5190,3340 ; 5190,3240 5215,3265 ; 5202.5,3255 5167.5,3255 5167.5,3182.5 5095,3182.5 ; 5207.5,3357.5 5190,3340 ; 5265,3335 5320,3335 5320,3407.5 5380,3407.5 ; 5267.5,3350 5335,3350 5335,3422.5 ; 5275,3225 5290,3240 ; 5277.5,3330 5277.5,3365 5350,3365 5350,3437.5 ; 5290,3315 5290,3377.5 5362.5,3377.5 5362.5,3425 ; 5290,3340 5265,3315 ; 5305,3255 5290,3240 ; 5305,3320 5305,3392.5 5377.5,3392.5 ; 5307.5,3290 5240,3222.5 5172.5,3290 5172.5,3292.5 5240,3360 5307.5,3292.5 ; 5573,4374 5573,4312 5748,4312 5748,4376 ; 5095,3182.5 5095,3180 5130,3145 5240,3255 5350,3145 5387.5,3182.5 5277.5,3292.5 5385,3400 5385,3402.5 5350,3437.5 ; 5095,3182.5 5202.5,3290 5092.5,3400 5130,3437.5 5240,3327.5 5350,3437.5 ; 5190,3340 5215,3315 ; 5215,3265 5265,3265 ; 5215,3265 5215,3315 ; 5215,3315 5265,3315 ; 5265,3265 5290,3240 ; 5265,3265 5265,3315
  text "Led_M1" at 4740,4260 h35.43
  text "Led_M2" at 5575,4260 h35.43
  text "F" at 5230,3270 h35.43
  text "HandsFree" at 5070,3130 h40
  text "F" at 6045,3120 h35.43
  text "100mil=2.54mm" at 4660,2075 h200
  text "Power" at 5795,1635 h35
Bottom Overlay:
  text "+" at 4970,4355 h35 r90
  text "-" at 5505,4355 h35
Bottom Solder:
  rectangle: 5400,3725 5650,3925
  rectangle: 4825,3725 5075,3925
  lines w80: 4775,4309 4870,4309 ccw(c4870,4314) 4875,4314 ; 4890,4310 4945,4255 4945,3775 ; 5525,3775 5525,4240 5600,4315 5685,4315 cw(c5685,4300) 5700,4300
  lines w100: 4987,3020.46 5069.54,3103 5410.46,3103 5493,3020.46 ; 4987,3237 5493,3237

## Dimensions
4645,2592 to 5845,2592 on Top Overlay
4645,4292 to 4645,2592 on Top Overlay